# Altium PCB DC_AC_Inverter.PcbDoc (part 1 of 4)
Units mil, origin at the board's own origin, x right, y up, seen from the top; angles counter-clockwise.
Board outline 6496.06 x 4566.93 mil, 6 copper layers (L1, L2, L3, L4, L5, L6), stack 22.312 mil thick; 133 components, 65 nets, 349 pads, 134 vias.
Unrouted connection lines stored in the file: 226.
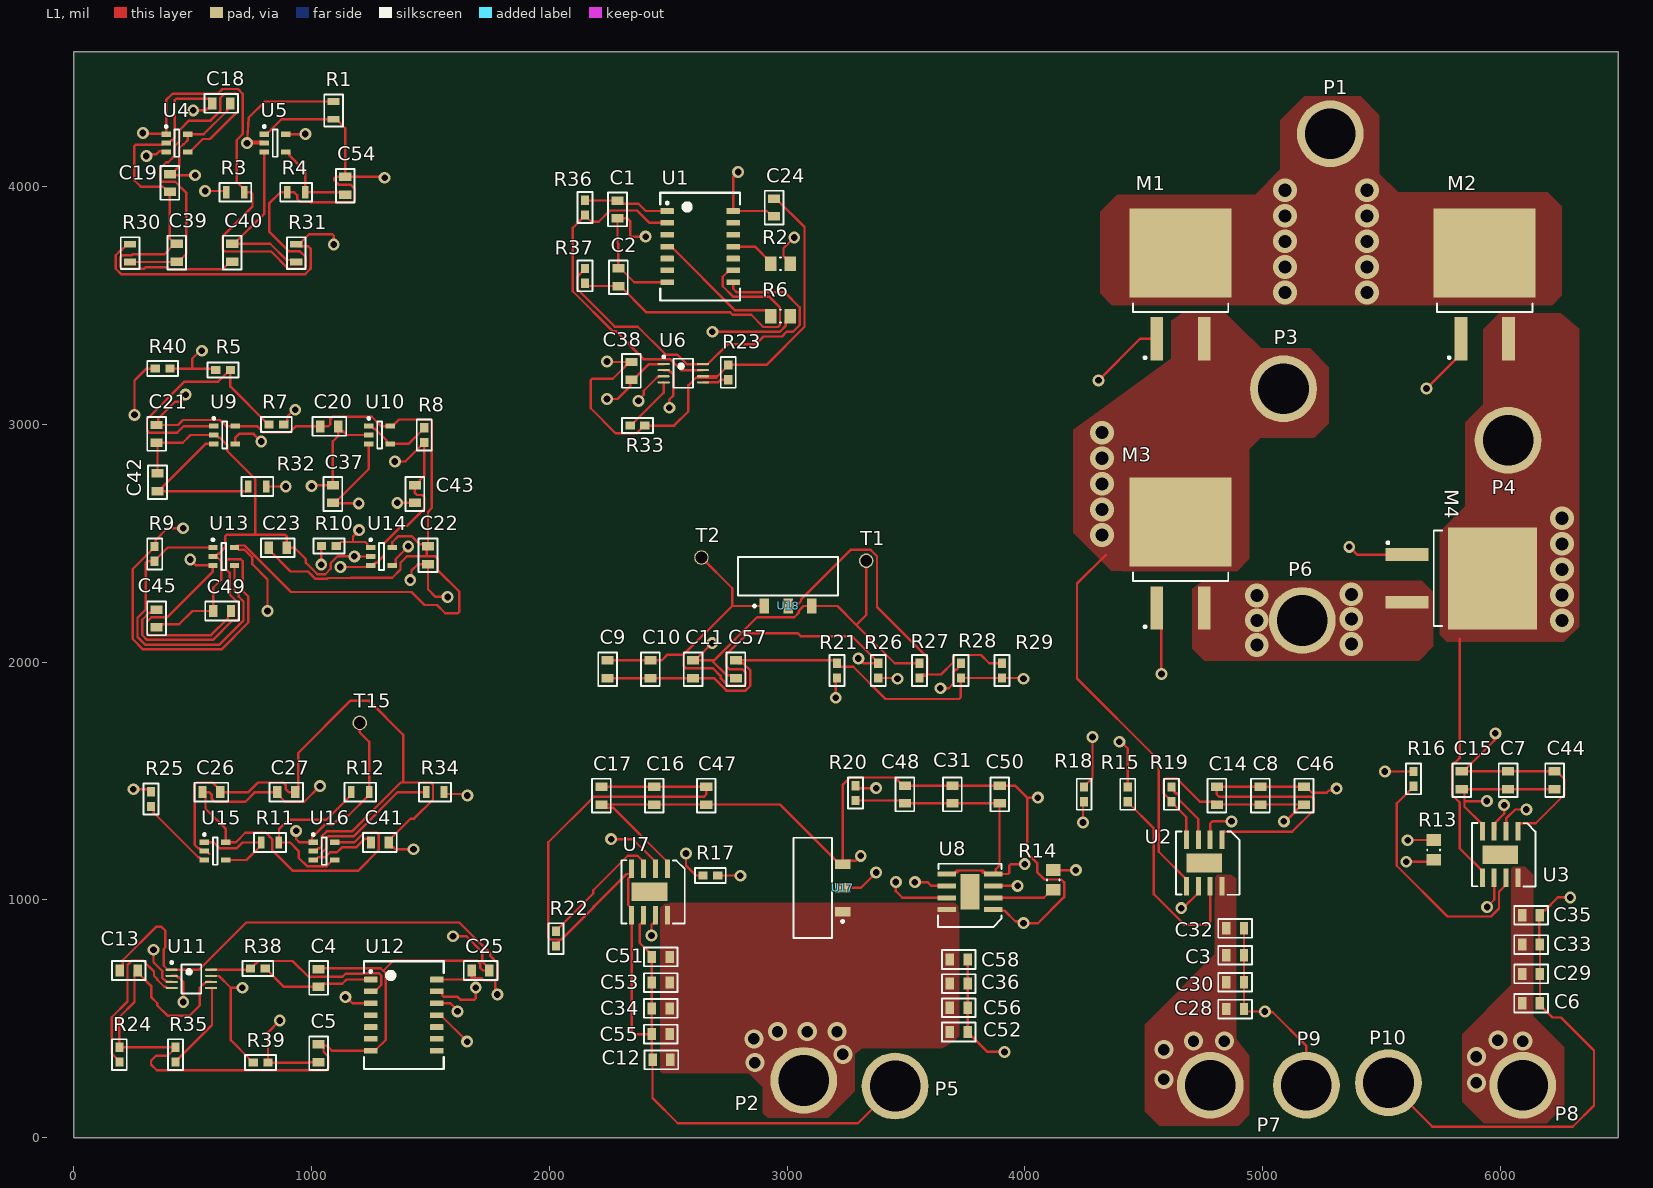
[diagram p0: L1 view]
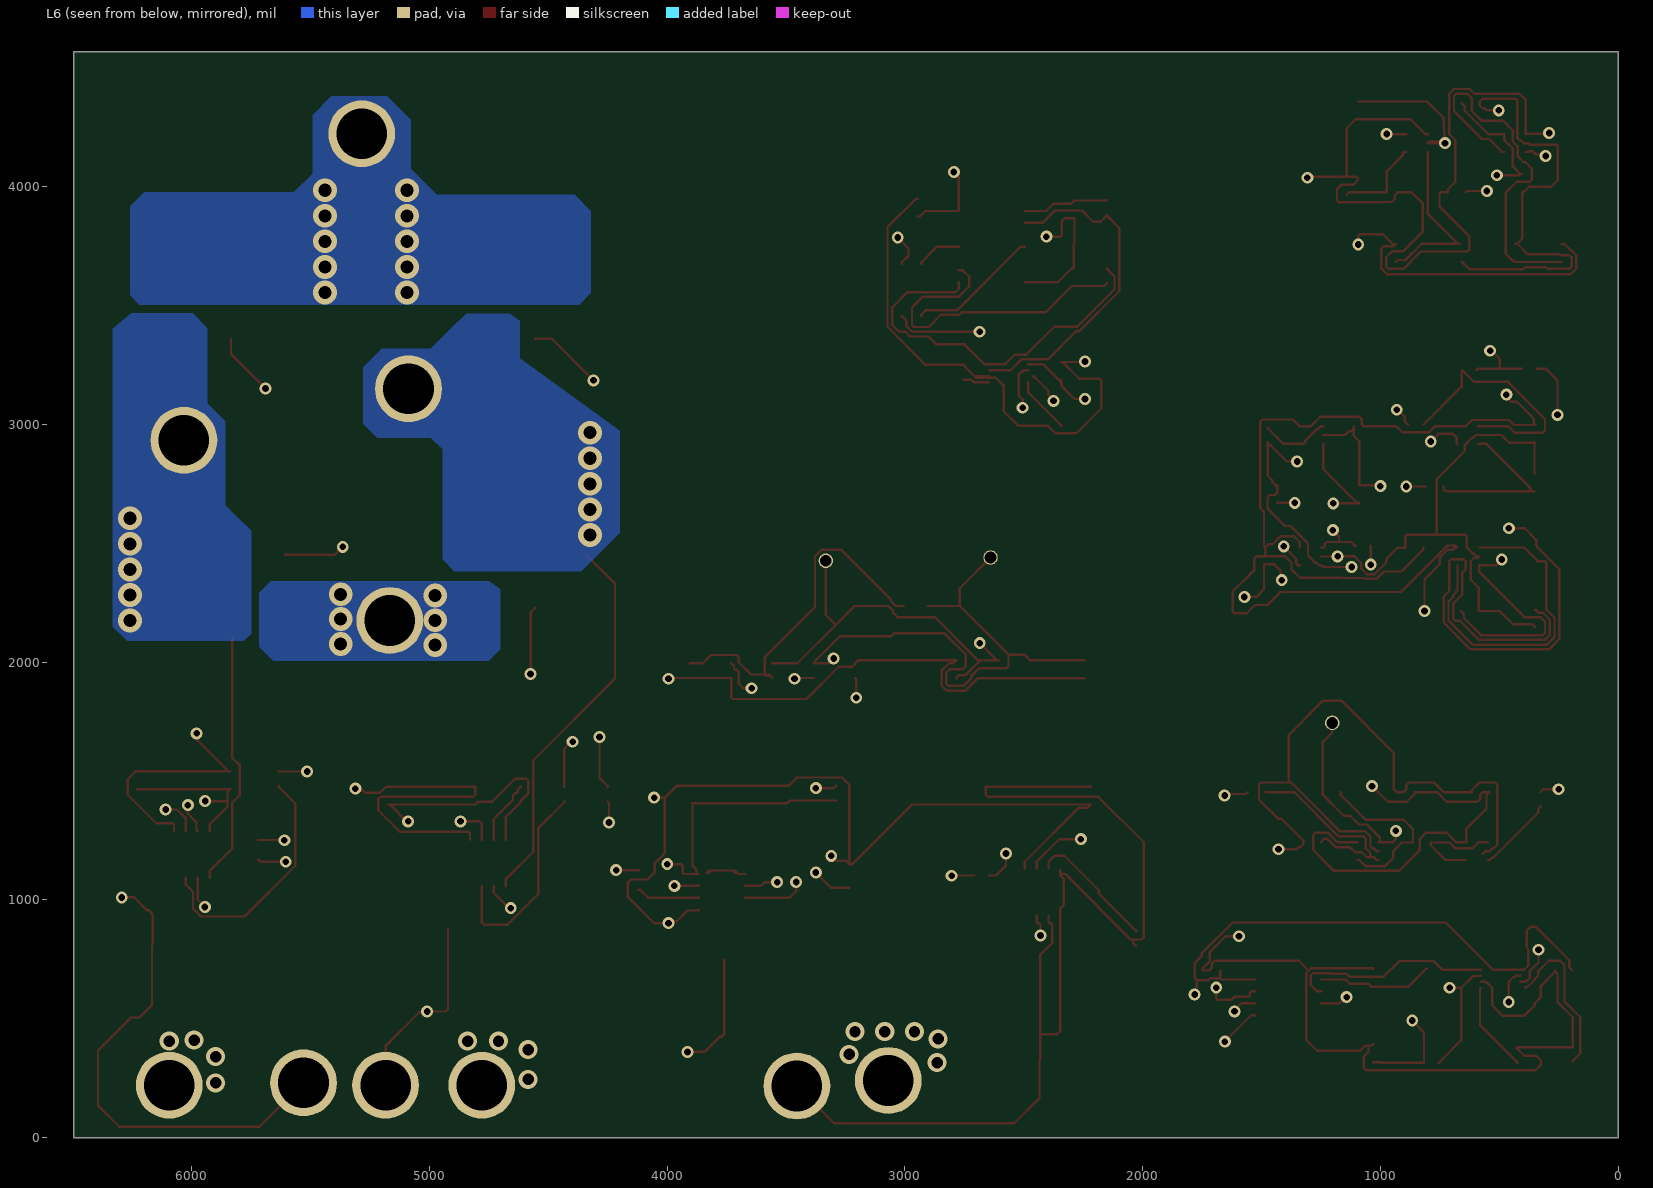
[diagram p1: L6 view, seen from below]
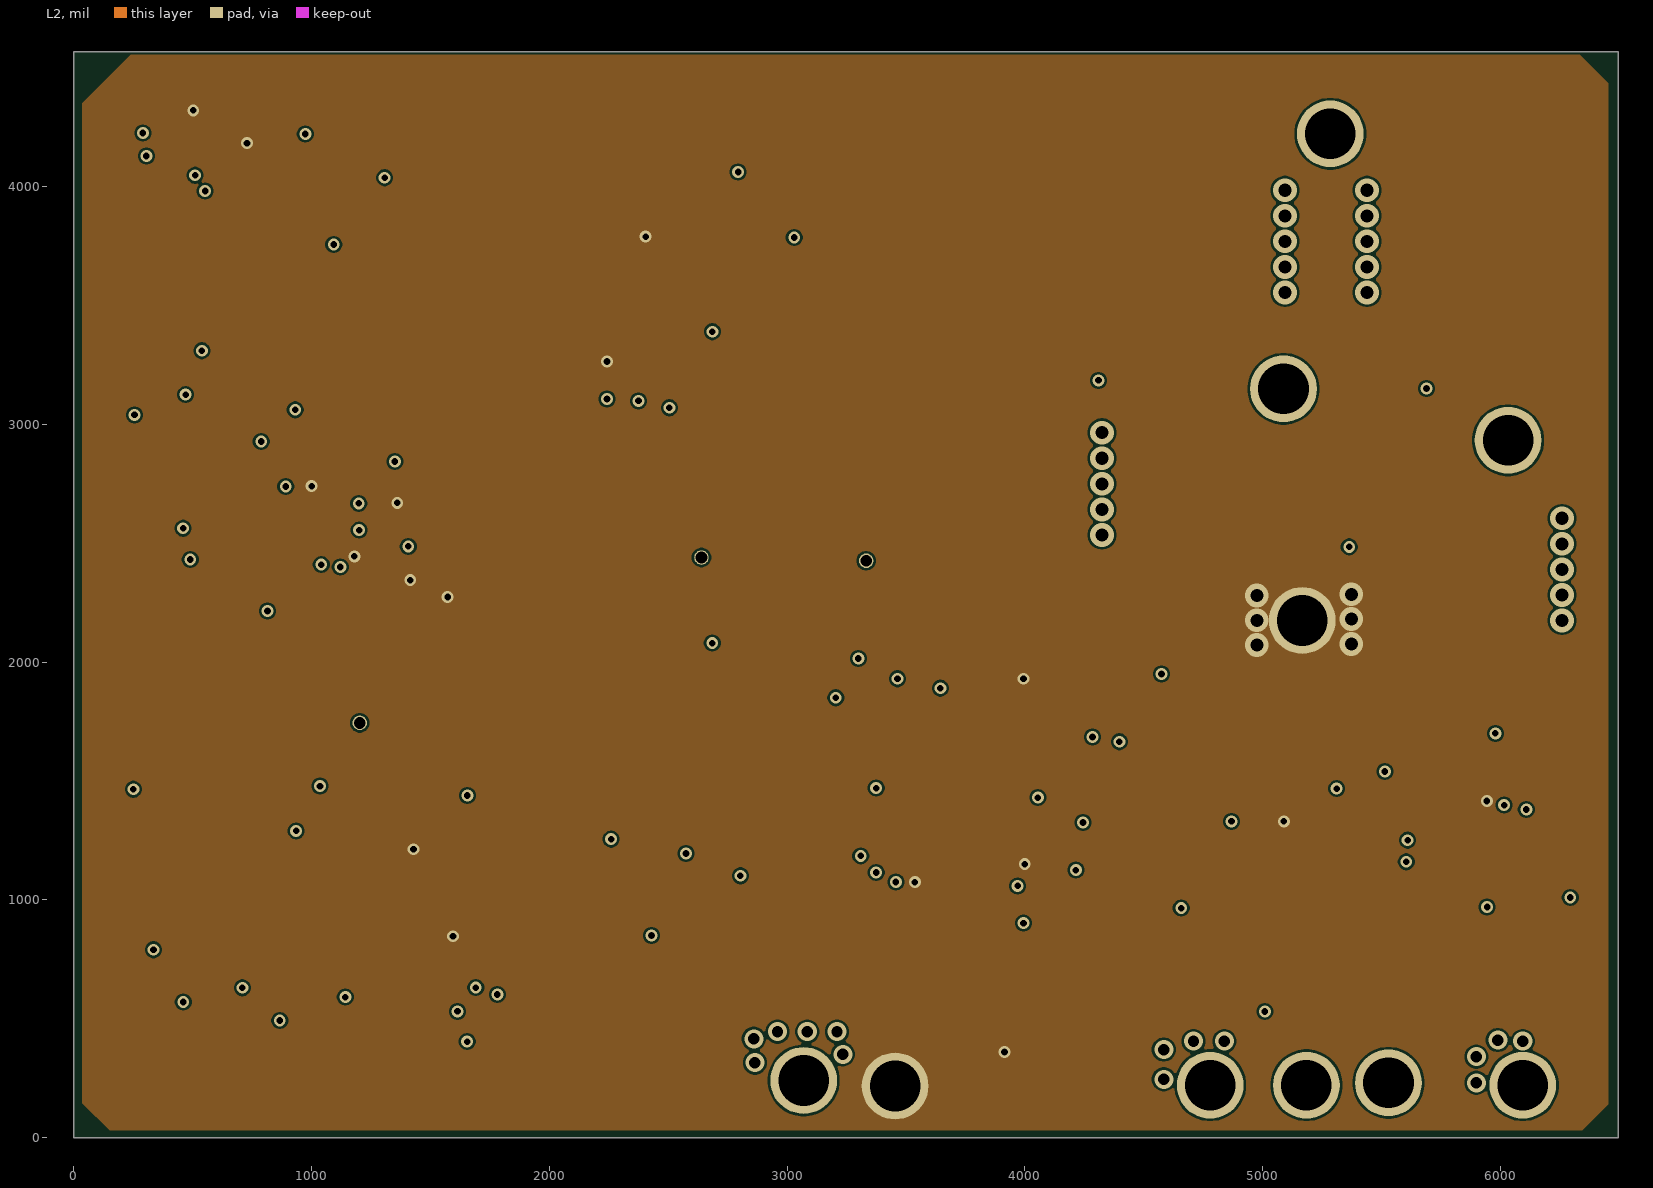
[diagram p2: L2]
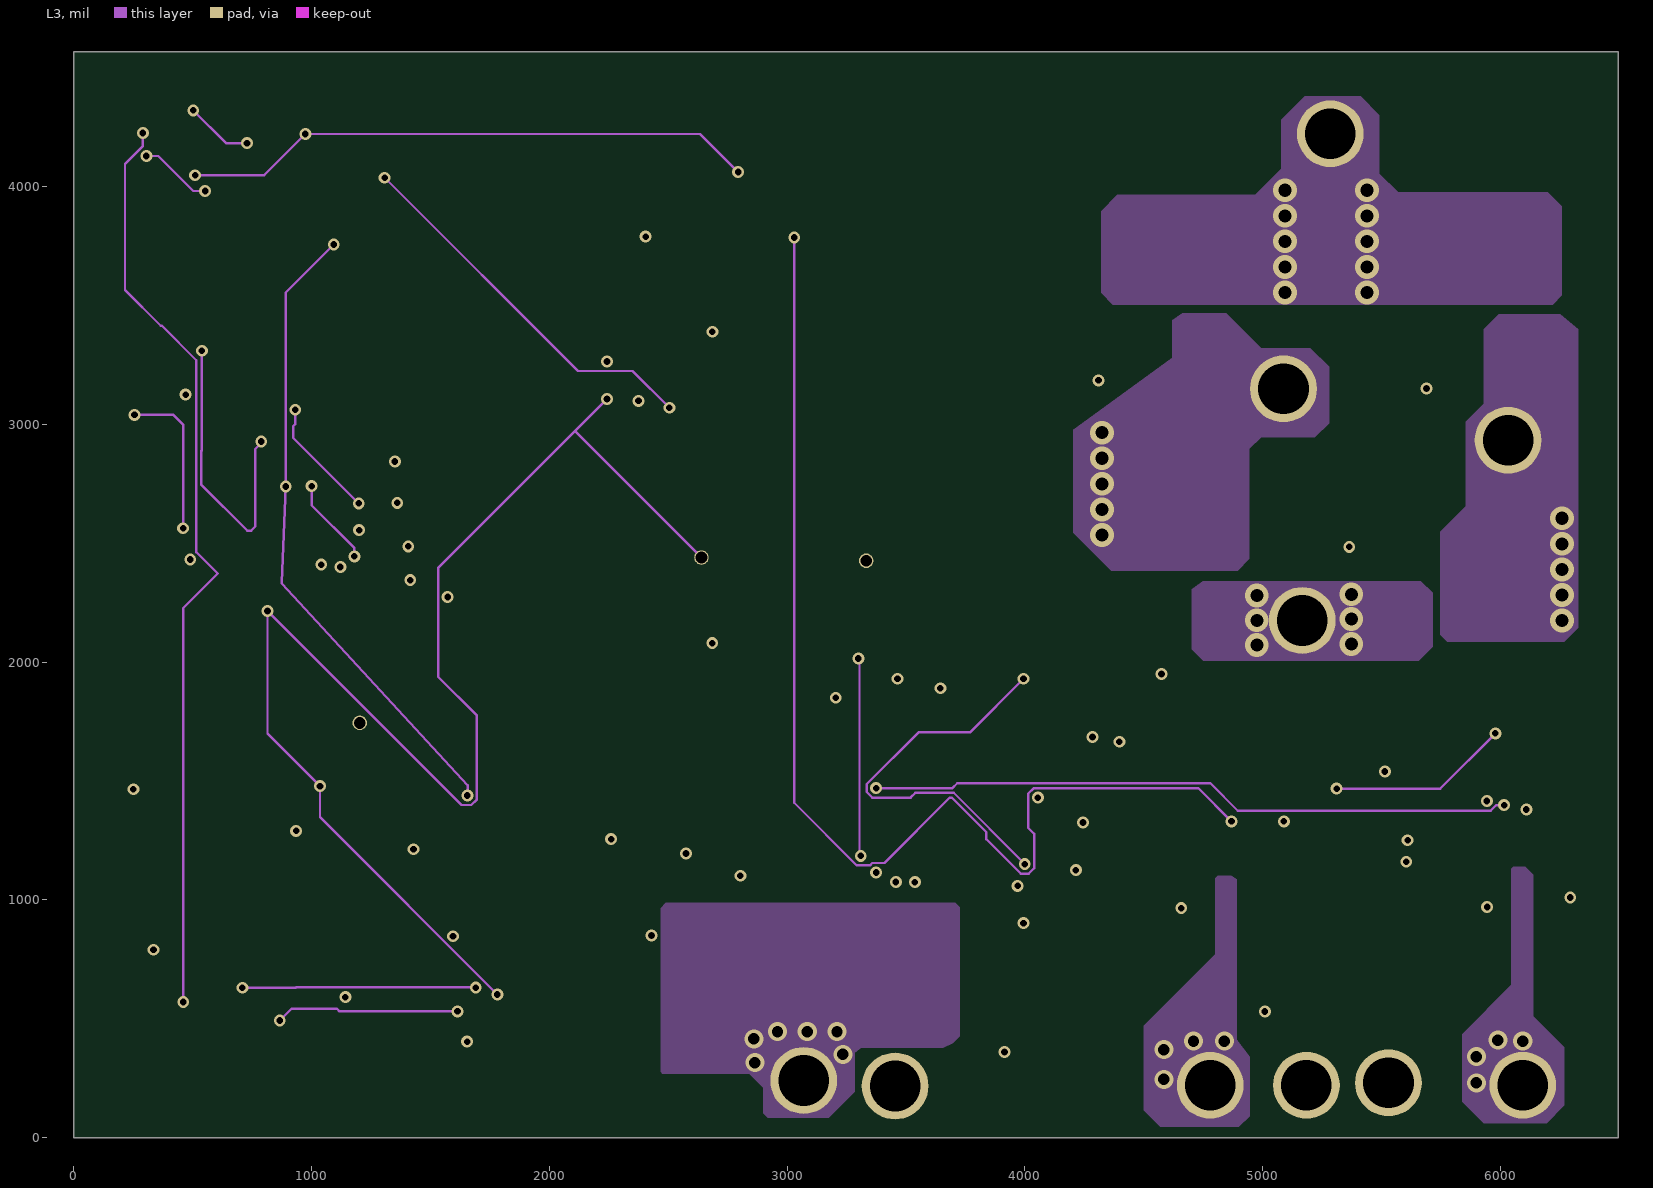
[diagram p3: L3]
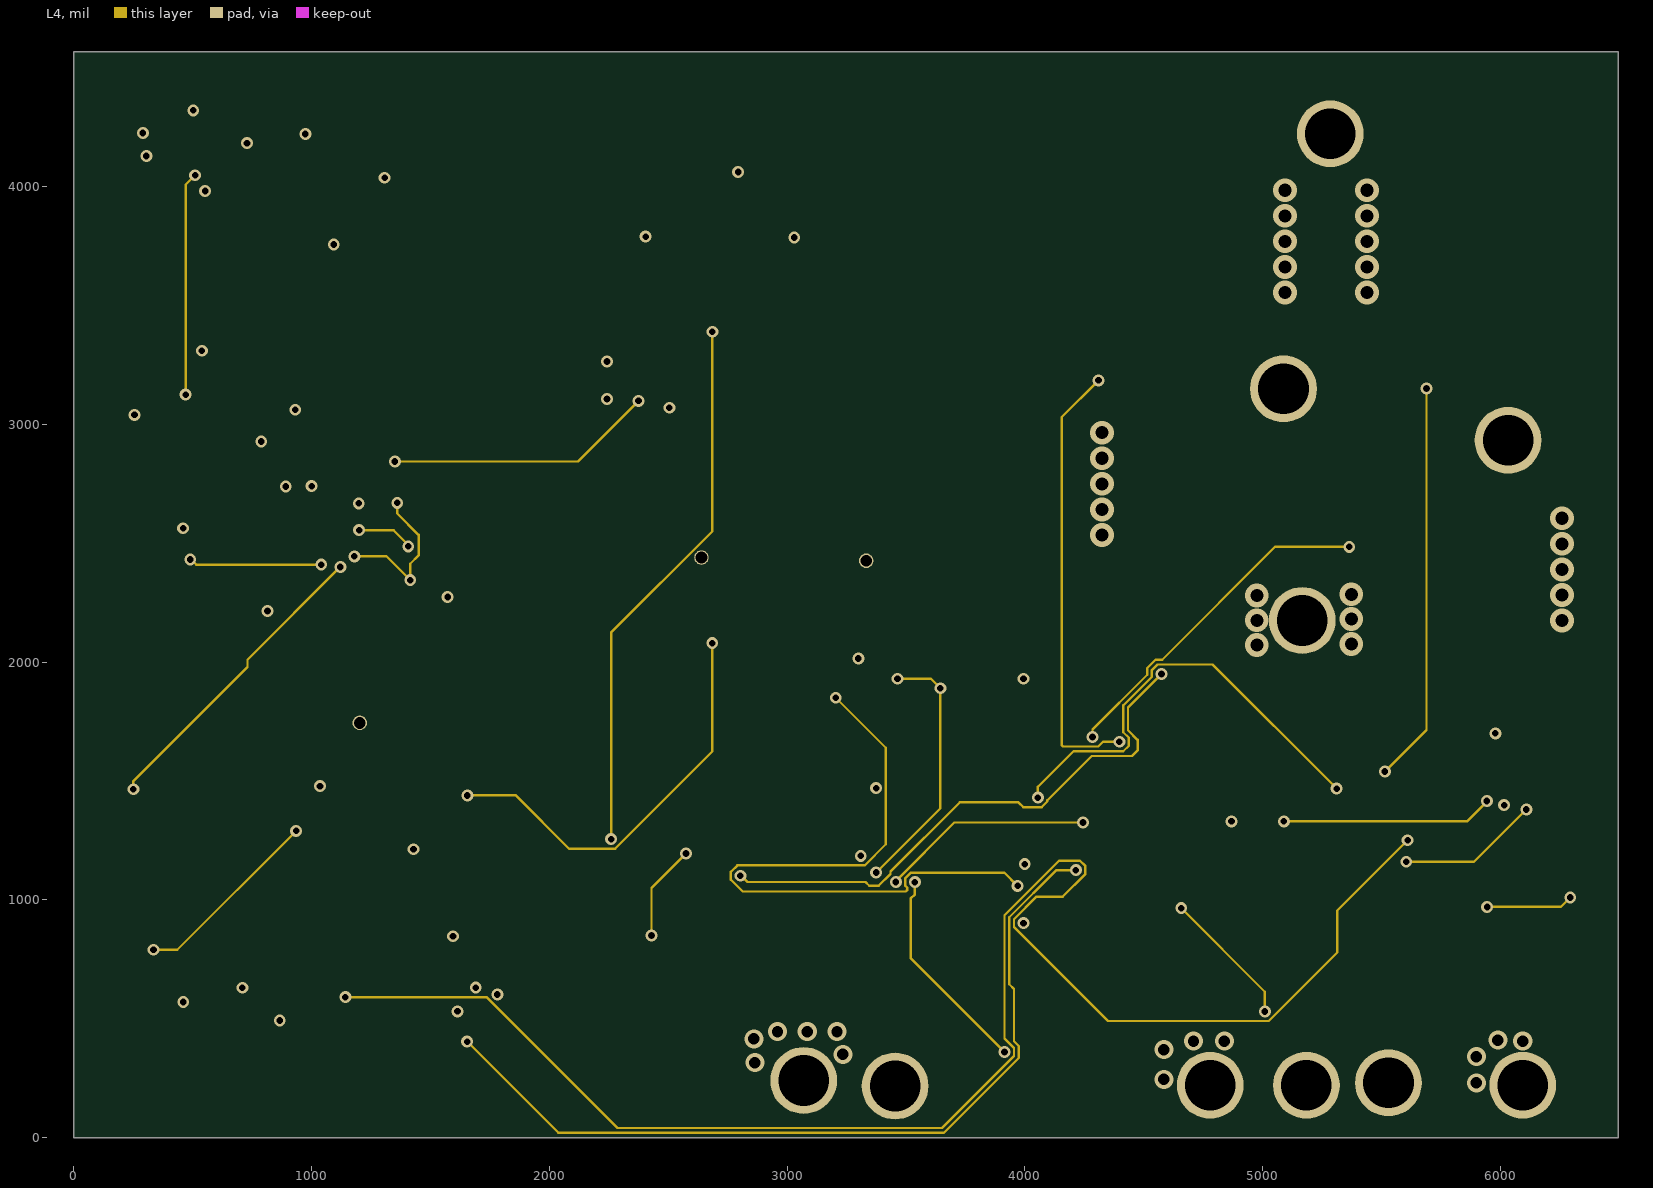
[diagram p4: L4]
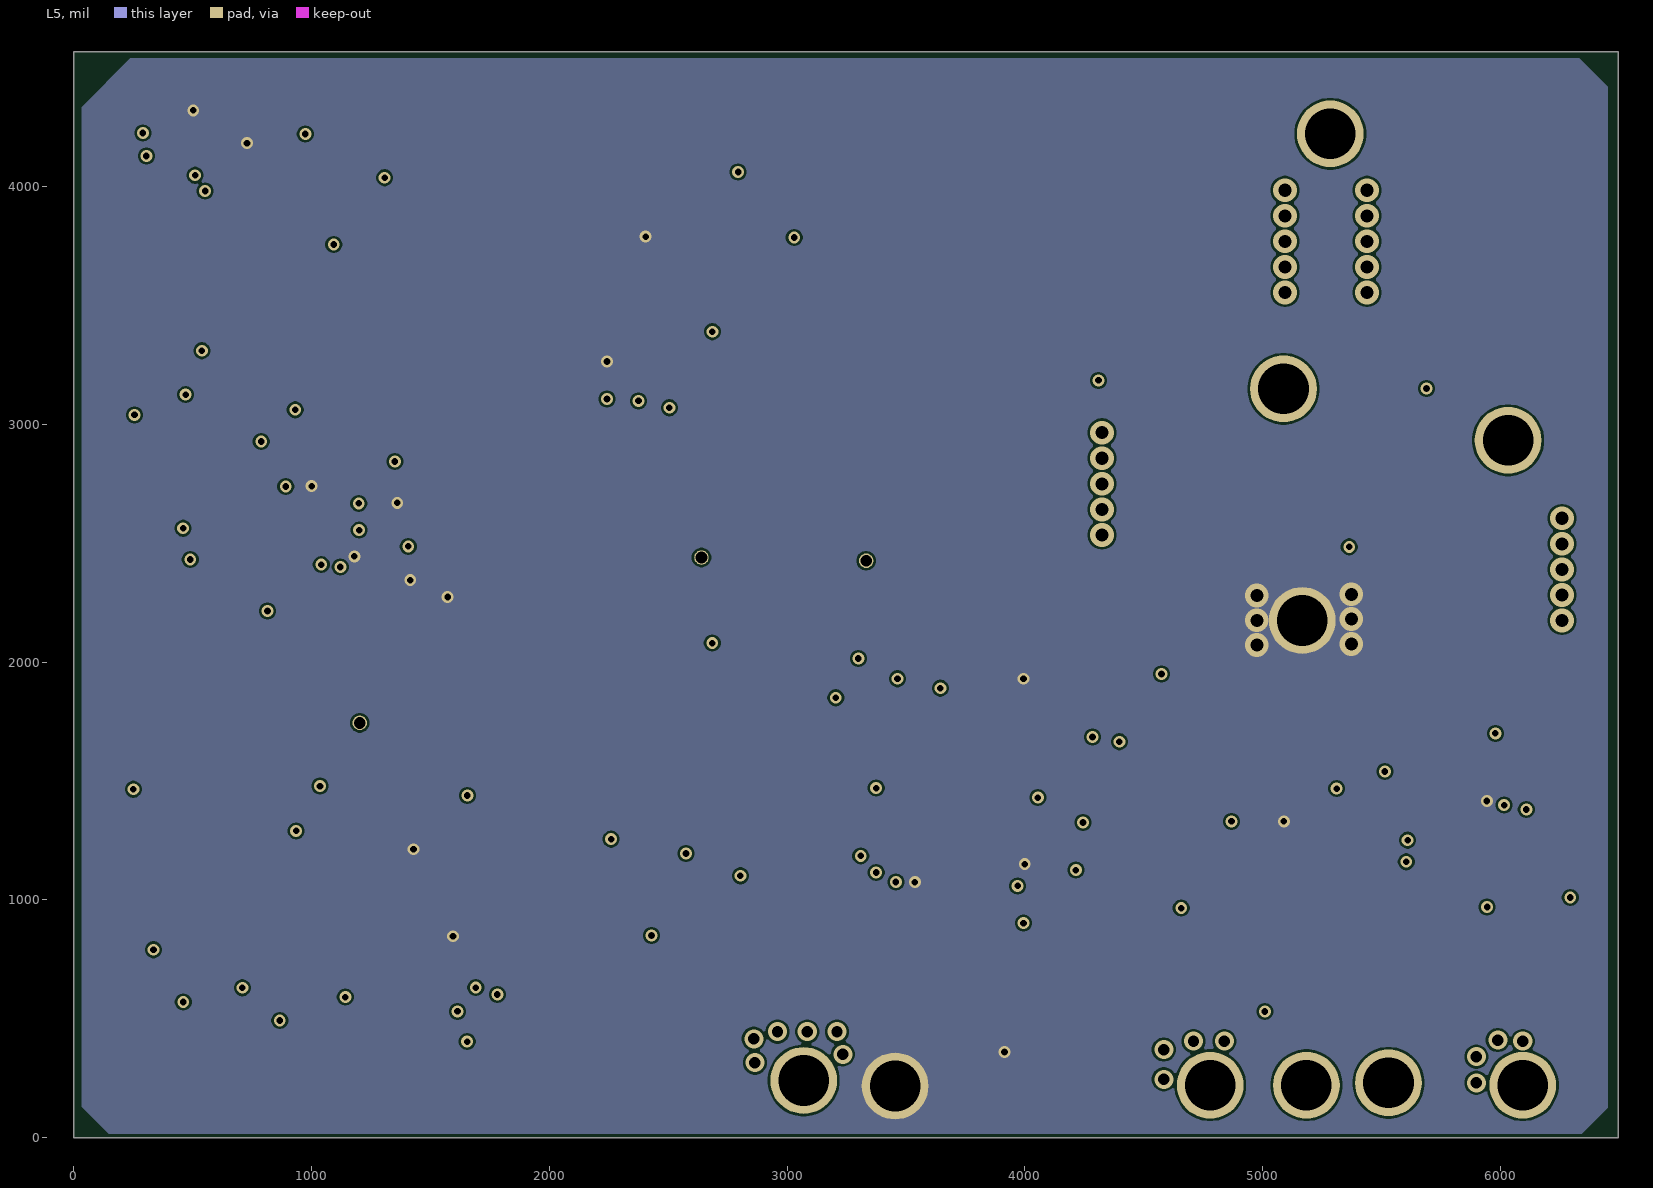
[diagram p5: L5]

## Layer stack, top to bottom
Top Solder: solder mask 0.4, Solder Resist, Dk 3.5
L1: signal copper 1.4
Dielectric 6: prepreg 2.8, PP-006, Dk 4.1
L2: signal copper 1.378
Dielectric 2: prepreg 2.8, PP-006, Dk 4.1
L3: signal copper 1.378
Dielectric 3: prepreg 2.8, PP-006, Dk 4.1
L4: signal copper 1.378
Dielectric 4: prepreg 2.8, PP-006, Dk 4.1
L5: signal copper 1.4
Dielectric 7: prepreg 2.8, PP-006, Dk 4.1
L6: signal copper 1.378
Bottom Solder: solder mask 0.4, Solder Resist, Dk 3.5

## Board outline
0,0 0,4566.93 6496.06,4566.93 6496.06,0

## Design rules (kind name [scope] priority, off if disabled: settings)
AcuteAngle [All] p1: minimum=8.80000000000000E+0001 checktracksonly=FALSE
Clearance [All] p1: gap=10 ignorepadtopadclearanceinfootprint=FALSE
ComponentClearance [All] p1: gap=6.3 collisioncheckmode=3 verticalgap=6.3 showdistances=FALSE
HoleSize [All] p1: absolutevalues=TRUE maxlimit=5000 minlimit=1 maxpercent=80.000 minpercent=20.000
MinimumSolderMaskSliver [All] p1: minsoldermaskwidth=3.94
PolygonConnect [All] p1: connectstyle=Direct reliefconductorwidth=10 reliefentries=4 polygonreliefangle="90 Angle" airgapwidth=10
RoutingVias [All] p1: holewidth=28 width=50 viastyle="Through Hole" minholewidth=28 minwidth=50 maxholewidth=28 maxwidth=50
SilkToSolderMaskClearance [IsPad] p1: minsilkscreentomaskgap=3.94 clearancetoexposedcopper=TRUE
SolderMaskExpansion [All] p1: expansion=4 istentingtop=FALSE
SupplyNets "Schematic Supply Nets_8" [InNet('-20V_1')] p1: voltage=0.000
SupplyNets "Schematic Supply Nets_2" [InNet('-20V_2')] p2: voltage=0.000
SupplyNets "Schematic Supply Nets_7" [InNet('+20V_1')] p3: voltage=0.000
SupplyNets "Schematic Supply Nets_6" [InNet('+20V_2')] p4: voltage=0.000
SupplyNets "Schematic Supply Nets_5" [InNet('GND')] p5: voltage=0.000
SupplyNets "Schematic Supply Nets_4" [InNet('+20V')] p6: voltage=0.000
SupplyNets "Schematic Supply Nets_3" [InNet('+5V')] p7: voltage=0.000
SupplyNets "Schematic Supply Nets_1" [InNet('+170')] p8: voltage=0.000
SupplyNets "Schematic Supply Nets" [InNet('+2.5V')] p9: voltage=0.000
Width [All] p1: maxlimit=10 minlimit=10 preferedwidth=10
26 further rules are at their usual default settings.

## Components (designator, comment, footprint, x,y, rotation, side; value= is the part's Value field where it differs from the comment)
C1 "1nF/50V" CAPACITOR 2286.67,3904.25 r270 top value=1nF
C2 "1nF/50V" CAPACITOR 2290.61,3619.35 r270 top value=1nF
C3 "100nF/50V" CAPACITOR 4885,766.67 r180 top value=100nF
C4 "1nF/50V" CAPACITOR 1029.53,671.26 r90 top value=1nF
C5 "1nF/50V" CAPACITOR 1029.53,354.29 r90 top value=1nF
C6 "100nF/50V" CAPACITOR 6130,565 r180 top value=100nF
C7 "100nF/50V" CAPACITOR 6033.6,1503.13 r90 top value=100nF
C8 "100nF/50V" CAPACITOR 4991.47,1438.13 r90 top value=100nF
C9 "1uF/6.3V" CAPACITOR 2245,1970 r90 top value=1µF
C10 "10uF/25V" CAPACITOR 2425,1970 r270 top value=10µF
C11 "1uF/6.3V" CAPACITOR 2605,1970 r90 top value=1µF
C12 "10uF/25V" CAPACITOR 2471.63,326.8 r180 top value=10µF
C13 "10nF/50V" CAPACITOR 230.31,702.76 r0 top value=10nF
C14 "1nF/50V" CAPACITOR 4808.07,1438.13 r90 top value=1nF
C15 "1nF/50V" CAPACITOR 5838.24,1503.13 r90 top value=1nF
C16 "1nF/50V" CAPACITOR 2441.27,1438.13 r270 top value=1nF
C17 "100nF/50V" CAPACITOR 2218.83,1438.13 r270 top value=100nF
C18 "10nF/16V" CAPACITOR 620.08,4350.39 r180 top value=10nF
C19 "10nF/16V" CAPACITOR 403.54,4015.75 r270 top value=10nF
C20 "10nF" CAPACITOR 1074.53,2991.65 r0 top
C21 "10nF/16V" CAPACITOR 347.82,2960.16 r270 top value=10nF
C22 "10nF/16V" CAPACITOR 1489.49,2449.37 r270 top value=10nF
C23 "10nF/16V" CAPACITOR 857.2,2480.87 r0 top value=10nF
C24 "10nF/16V" CAPACITOR 2945.67,3912.13 r270 top value=10nF
C25 "10nF/16V" CAPACITOR 1710.63,702.76 r0 top value=10nF
C26 "10nF/16V" CAPACITOR 578.46,1452.83 r0 top value=10nF
C27 "10nF/16V" CAPACITOR 893.43,1452.83 r0 top value=10nF
C28 "1nF/50V" CAPACITOR 4885,540 r180 top value=1nF
C29 "1nF/50V" CAPACITOR 6130,688.33 r180 top value=1nF
C30 "68nF/50V" CAPACITOR 4885,653.33 r180 top value=68nF
C31 "100nF/50V" CAPACITOR 3695.43,1443.13 r90 top value=100nF
C32 "22uF/25V" CAPACITOR 4885,880 r180 top value=22µF
C33 "68nF/50V" CAPACITOR 6130,811.67 r180 top value=68nF
C34 "100nF/50V" CAPACITOR 2468.68,543.34 r0 top value=100nF
C35 "22uF/25V" CAPACITOR 6130,935 r180 top value=22µF
C36 "100nF/50V" CAPACITOR 3722.32,647.33 r180 top value=100nF
C37 "100nF/50V" CAPACITOR 1089.23,2707.2 r270 top value=100nF
C38 "10nF/16V" CAPACITOR 2345.24,3225.08 r90 top value=10nF
C39 "1uF/6.3V" CAPACITOR 432.41,3722.44 r90 top value=1µF
C40 "1uF/6.3V" CAPACITOR 666.01,3722.44 r90 top value=1µF
C41 "1uF/6.3V" CAPACITOR 1287.13,1241.22 r0 top value=1µF
C42 "1uF/6.3V" CAPACITOR 351.69,2756.42 r270 top value=1µF
C43 "100nF/50V" CAPACITOR 1434.37,2707.2 r90 top value=100nF
C44 "1uF/6.3V" CAPACITOR 6228.96,1503.13 r90 top value=1µF
C45 "100nF/50V" CAPACITOR 347.82,2183.58 r90 top value=100nF
C46 "1uF/6.3V" CAPACITOR 5174.87,1438.13 r90 top value=1µF
C47 "1uF/6.3V" CAPACITOR 2660,1438.13 r270 top value=1µF
C48 "1nF/50V" CAPACITOR 3495.96,1443.13 r90 top value=1nF
C49 "100nF/50V" CAPACITOR 623.35,2215.08 r0 top value=100nF
C50 "1uF/6.3V" CAPACITOR 3894.91,1443.13 r90 top value=1µF
C51 "1nF/50V" CAPACITOR 2468.68,759.87 r0 top value=1nF
C52 "1nF/50V" CAPACITOR 3722.32,443.91 r180 top value=1nF
C53 "68nF/50V" CAPACITOR 2468.68,651.61 r0 top value=68nF
C54 "3.9nF/50V" CAPACITOR 1141.73,4003.94 r90 top value=3.9nF
C55 "22uF/25V" CAPACITOR 2468.68,435.07 r0 top value=22µF
C56 "68nF/50V" CAPACITOR 3722.32,545.62 r180 top value=68nF
C57 "10uF/25V" CAPACITOR 2785,1970 r90 top value=10µF
C58 "22uF/25V" CAPACITOR 3722.32,749.03 r180 top value=22µF
M1 "N-Channel MOSFET 200V" SOT89-254P1058X483-3N 4655.51,3540.35 r90 top
M2 "N-Channel MOSFET 200V" SOT89-254P1058X483-3N 5935.04,3540.35 r90 top
M3 "N-Channel MOSFET 200V" SOT89-254P1058X483-3N 4655.51,2408.46 r90 top
M4 "N-Channel MOSFET 200V" SOT89-254P1058X483-3N 5787.4,2352.36 r0 top
P1 "PEM" PEMS 5285.43,4222.44 r0 top
P2 "PEM" PEMS 3070,240 r0 top
P3 "PEM" PEMS 5088.58,3149.61 r0 top
P4 "PEM" PEMS 6033.46,2933.07 r0 top
P5 "PEM" PEMs 3454.72,216.54 r0 top
P6 "PEM" PEMs 5167.32,2175.2 r0 top
P7 "PEM" PEMs 4780,220 r0 top
P8 "PEM" PEMs 6095,220 r0 top
P9 "PEM" PEMs 5185,220 r0 top
P10 "PEM" PEMs 5530,230 r0 top
R1 "10k" R0805 1092.52,4320.87 r90 top value=10kΩ
R2 "5K" RESIS5K 2972.31,3675.91 r0 top value=5kΩ
R3 "10k" R0805 679.13,3976.38 r0 top value=10kΩ
R4 "10k" R0805 935.04,3976.38 r0 top value=10kΩ
R5 "2.2M" Resistor-26.7 627.28,3228.86 r0 top value=2.2MΩ
R6 "5K" RESIS5K 2972.31,3455.43 r0 top value=5kΩ
R7 "26.7k" RESISTOR-26.7 851.34,2999.53 r0 top value=26.7kΩ
R8 "26.7k" RESISTOR-26.7 1473.74,2955.24 r90 top value=26.7kΩ
R9 "26.7k" RESISTOR-26.7 339.94,2455.24 r270 top value=26.7kΩ
R10 "26.7k" RESISTOR-26.7 1072.6,2488.74 r0 top value=26.7kΩ
R11 "10k" R0805 825.14,1241.22 r0 top value=10kΩ
R12 "10k" R0805 1204.45,1452.83 r0 top value=10kΩ
R13 "5K" RESIS5K 5720,1210 r90 top value=5kΩ
R14 "5K" RESIS5K 4120,1083.66 r90 top value=5kΩ
R15 "0 ohm" RESISTOR-26.7 4433.4,1444 r270 top value=0Ω
R16 "0 ohm" RESISTOR-26.7 5635,1509 r90 top value=0Ω
R17 "0 ohm" RESISTOR-26.7 2677.17,1102.36 r180 top value=0Ω
R18 "0 ohm" RESISTOR-26.7 4250,1444 r90 top value=0Ω
R19 "0 ohm" RESISTOR-26.7 4616.8,1444 r270 top value=0Ω
R20 "0 ohm" RESISTOR-26.7 3288.61,1449 r90 top value=0Ω
R21 "0 ohm" RESISTOR-26.7 3210,1964.13 r90 top value=0Ω
R22 "0 ohm" RESISTOR-26.7 2027.56,836.61 r270 top value=0Ω
R23 "0 ohm" RESISTOR-26.7 2752.76,3219.21 r270 top value=0Ω
R24 "0 ohm" RESISTOR-26.7 190.94,348.43 r90 top value=0Ω
R25 "0 ohm" RESISTOR-26.7 325,1424 r90 top value=0Ω
R26 "240" RESISTOR-26.7 3383.75,1964.13 r90 top value=240Ω
R27 "240" RESISTOR-26.7 3557.5,1964.13 r90 top value=240Ω
R28 "750 ohm" RESISTOR-26.7 3731.25,1964.13 r90 top value=750Ω
R29 "240" RESISTOR-26.7 3905,1964.13 r90 top value=240Ω
R30 "10k" R0805 236.22,3720.47 r270 top value=10kΩ
R31 "10k" R0805 935.04,3720.47 r90 top value=10kΩ
R32 "10k" R0805 771.64,2738.7 r0 top value=10kΩ
R33 "0 ohm" RESISTOR-26.7 2370.87,2994.8 r180 top value=0Ω
R34 "10k" R0805 1519.41,1452.83 r0 top value=10kΩ
R35 "0 ohm" RESISTOR-26.7 427.17,348.43 r90 top value=0Ω
R36 "0 ohm" RESISTOR-26.7 2150.39,3912.13 r270 top value=0Ω
R37 "0 ohm" RESISTOR-26.7 2150.39,3625.22 r90 top value=0Ω
R38 "0 ohm" RESISTOR-26.7 773.62,710.63 r180 top value=0Ω
R39 "0 ohm" RESISTOR-26.7 785.43,314.92 r180 top value=0Ω
R40 "470k" RESISTOR-26.7 373.45,3234.76 r0 top value=470kΩ
T1 "Testpoint" TESTPOINTS 3332.97,2426.34 r0 top
T2 "Testpoint" TESTPOINTS 2640,2440 r0 top
T15 "Testpoint" TESTPOINTS 1202.48,1744.17 r0 top
U1 "AND GATE IC" ANDLOGICIC 2634.65,3747.68 r0 top
U2 "MAX22700EASA+" MAX227 4755,1155 r270 top
U3 "MAX22700EASA+" MAX227 6000,1190 r270 top
U4 "LTC6240" LTC6240 433.07,4183.07 r0 top
U5 "LTC6240" LTC6240 846.46,4183.07 r0 top
U6 "LT1711" LT1711 2563.78,3215.24 r0 top
U7 "MAX22700EASA+" MAX227 2421.26,1033.46 r270 top
U8 "MAX22700EASA+" MAX227 3769.69,1033.46 r180 top
U9 "LTC6240" LTC6240 634.04,2955.24 r0 top
U10 "LTC6240" LTC6240 1286.01,2955.24 r0 top
U11 "LT1711" LT1711 494.09,667.32 r0 top
U12 "AND GATE IC" ANDLOGICIC 1387.8,514.68 r0 top
U13 "LTC6240" LTC6240 630.1,2444.45 r0 top
U14 "LTC6240" LTC6240 1293.88,2444.45 r0 top
U15 "LTC6240" LTC6240 594.21,1204.8 r0 top
U16 "LTC6240" LTC6240 1052.26,1204.8 r0 top
U17 "Voltage Regulator" SOT254P700X939-4N 3108.66,1050.2 r180 top
U18 "Voltage Regulator" SOT254P700X939-4N 3004.38,2361.09 r90 top

## Footprints (in the part's own frame and the unit in brackets; to place one, negate y for a bottom-side part, rotate by r counter-clockwise, add the part's x,y. Pads: shape width x height; smd on the part's side, far side on the other; paste and mask are expansions set on the pad)
ANDLOGICIC [mm] "SOP, 14-Leads, Body 10.2x5.3mm, Pitch 1.27mm, IPC High Density"
  rrect17% 1.45x0.6 smd: 1(-3.525,3.81) 2(-3.525,2.54) 3(-3.525,1.27) 4(-3.525,0) 5(-3.525,-1.27) 6(-3.525,-2.54) 7(-3.525,-3.81) 8(3.525,-3.81) 9(3.525,-2.54) 10(3.525,-1.27) 11(3.525,0) 12(3.525,1.27) 13(3.525,2.54) 14(3.525,3.81)
  silkscreen extent -4.25,-5.75 4.25,5.75, body extent -2.8,-5.25 2.8,5.25, height 2
CAPACITOR [mm]
  rect 0.9x1.3 smd: 1(-0.95,0) 2(0.95,0)
  silkscreen extent -1.8,-1 1.8,1
LT1711 [mm] "SOP, 8-Leads, Body 3x3mm, Pitch 0.65mm, IPC High Density"
  oval 1.3x0.22 smd: 1(-2.1,0.975) 2(-2.1,0.325) 3(-2.1,-0.325) 4(-2.1,-0.975) 5(2.1,-0.975) 6(2.1,-0.325) 7(2.1,0.325) 8(2.1,0.975)
  silkscreen extent -2.22,-1.55 1.05,1.87, body extent -1.55,-1.55 1.55,1.55, height 1.1
LTC6240 [mm] "SOT23, 5-Leads, Body 2.90x1.63mm, Pitch 0.95mm, IPC High Density"
  rect 1x0.55 smd: 1(-1.15,0.95) 2(-1.15,0) 3(-1.15,-0.95) 4(1.15,-0.95) 5(1.15,0.95)
  silkscreen extent -1.27,-1.45 0.25,1.9, body extent -0.87,-1.45 0.87,1.45, height 1
MAX227 [mm]
  rect 1.98x0.53 smd: 1(-2.485,1.905) 2(-2.485,0.635) 3(-2.485,-0.635) 4(-2.485,-1.905) 5(2.485,-1.905) 6(2.485,-0.635) 7(2.485,0.635) 8(2.485,1.905)
  rect 2x3.8 smd: 9(0,0)
  silkscreen extent -3.37,-3 3.4,3.76
PEMS [mil] "Brass Surface Mount Nuts and Spacers / Type SMTSOB"
  round 281 hole 213 paste+0: 1(0,0)
PEMs [mil] "Brass Surface Mount Nuts and Spacers / Type SMTSOB"
  round 281 hole 213 paste+0: 1(0,0)
R0805 [mm]
  rect 0.7x1.3 smd: 1(-0.95,0) 2(0.95,0)
  silkscreen extent -1.7,-1 1.7,1
RESIS5K [mm] "Chip Resistor, 2-Leads, Body 2.03x1.27mm, IPC Low Density"
  rect 1.25x1.55 smd: 1(-1.05,0) 2(1.05,0)
  silkscreen extent -0.05,-0.67 0.05,0.67, body extent -1.09,-0.71 1.09,0.71, height 0.83
Resistor-26.7 [mm]
  rect 0.99x0.86 smd: 1(-0.787,0) 1(-0.787,0) 2(0.787,0) 2(0.787,0)
  silkscreen extent -1.65,-0.8 1.65,0.8
RESISTOR-26.7 [mm]
  rect 0.99x0.86 smd: 1(-0.787,0) 2(0.787,0)
  silkscreen extent -1.65,-0.8 1.65,0.8
SOT89-254P1058X483-3N [mm] "SOT89, 3-Leads, Body 10.16x9.02mm, Pitch 2.54mm, Lead Span 10.6mm, IPC Medium Density"
  rect 9.5x10.9 smd paste-0.05 mask+0: Drain(4.575,0)
  rect 4.6x1.35 smd paste-2539.97 mask+0: Gate(-4.575,2.54)
  rect 4.6x1.35 smd paste-0.05 mask+0: Source(-4.575,-2.54)
  silkscreen extent -6.72,-5.1 -0.8,5.1, body extent -6.27,-5 8.68,5, height 4.51
SOT254P700X939-4N [mm] "SOT223, 4-Leads, Body 10.36x7.00mm (avg), Pitch 2.54mm, IPC Medium Density"
  rect 1.65x1 smd: 1(-3.175,2.54) 2(-3.175,0) 3(-3.175,-2.54)
  silkscreen extent -3.3,-5.35 2.05,5.35, body extent -2.35,-5.35 2.35,5.35, height 12.17
TESTPOINTS [mm]
  round 1.55 hole 1.25: T(0,0)

## Part data
C1 C2 C4 C5 C14 C15 C16 C28 C29 C48 C51 C52: library part C0603C102K5RACTU, "Multilayer Ceramic Capacitors Mlcc - Smd/Smt 50V 1000Pf X7R 0603 10%", Case Code (Imperial)=0603, Dielectric=X7R, Dielectric Material=Ceramic, Manufacturer=KEMET, Max Operating Temperature=125°C, Min Operating Temperature=-55°C, Supplier Part Number=399-C0603C102K5RACTUDKR-ND, Temperature Coefficient=30ppm/°C, Tolerance=10%, Voltage=50V, Case/Package=0603, Category="Ceramic Capacitors", China RoHS=Compliant, ComponentLink1Description=https://datasheet.octopart.com:443/C0603C102K5RAC7867-KEMET-datasheet-179096092.pdf?src-supplier=IHS, ComponentLink1URL=https://datasheet.octopart.com:443/C0603C102K5RAC7867-KEMET-datasheet-179096092.pdf?src-supplier=IHS, ComponentLink2Description=https://datasheet.octopart.com:443/C0603C102K5RACTU-KEMET-datasheet-178445679.pdf?src-supplier=IHS, ComponentLink2URL=https://datasheet.octopart.com:443/C0603C102K5RACTU-KEMET-datasheet-178445679.pdf?src-supplier=IHS, ComponentLink3Description=https://datasheet.octopart.com:443/C0603C102K5RACTU-KEMET-datasheet-137357759.pdf?src-supplier=Farnell, ComponentLink3URL=https://datasheet.octopart.com:443/C0603C102K5RACTU-KEMET-datasheet-137357759.pdf?src-supplier=Farnell, ComponentLink4Description=https://datasheet.octopart.com:443/C0603C102K5RAC-TU-Kemet-datasheet-5313890.pdf?src-supplier=Farnell, ComponentLink4URL=https://datasheet.octopart.com:443/C0603C102K5RAC-TU-Kemet-datasheet-5313890.pdf?src-supplier=Farnell, ComponentLink5Description=https://datasheet.octopart.com:443/C0603C102K5RACTU-Kemet-datasheet-8764837.pdf?src-supplier=Farnell, ComponentLink5URL=https://datasheet.octopart.com:443/C0603C102K5RACTU-Kemet-datasheet-8764837.pdf?src-supplier=Farnell, ComponentLink6Description=https://datasheet.octopart.com:443/C0603C102K5RACTU-Kemet-datasheet-8480123.pdf?src-supplier=Farnell, ComponentLink6URL=https://datasheet.octopart.com:443/C0603C102K5RACTU-Kemet-datasheet-8480123.pdf?src-supplier=Farnell, ComponentLink7Description=https://datasheet.octopart.com:443/C0603C102K5RAC-TU-Kemet-datasheet-5390537.pdf?src-supplier=Farnell, ComponentLink7URL=https://datasheet.octopart.com:443/C0603C102K5RAC-TU-Kemet-datasheet-5390537.pdf?src-supplier=Farnell, ComponentLink8Description=https://datasheet.octopart.com:443/C0603C102K5RACTU-Kemet-datasheet-5393970.pdf?src-supplier=Farnell, ComponentLink8URL=https://datasheet.octopart.com:443/C0603C102K5RACTU-Kemet-datasheet-5393970.pdf?src-supplier=Farnell, ComponentLink9Description=https://datasheet.octopart.com:443/C0603C102K5RACTU-Kemet-datasheet-8502025.pdf?src-supplier=Farnell, ComponentLink9URL=https://datasheet.octopart.com:443/C0603C102K5RACTU-Kemet-datasheet-8502025.pdf?src-supplier=Farnell, ComponentLink10Description=https://datasheet.octopart.com:443/C0603C102K5RAC-TU-Kemet-datasheet-7541751.pdf?src-supplier=Farnell, ComponentLink10URL=https://datasheet.octopart.com:443/C0603C102K5RAC-TU-Kemet-datasheet-7541751.pdf?src-supplier=Farnell, ComponentLink11Description=https://datasheet.octopart.com:443/C0603C102K5RACTU-Kemet-datasheet-161801.pdf?src-supplier=Farnell, ComponentLink11URL=https://datasheet.octopart.com:443/C0603C102K5RACTU-Kemet-datasheet-161801.pdf?src-supplier=Farnell, ComponentLink12Description=https://datasheet.octopart.com:443/C0603C102K5RACTU-KEMET-datasheet-101575634.pdf?src-supplier=Farnell, ComponentLink12URL=https://datasheet.octopart.com:443/C0603C102K5RACTU-KEMET-datasheet-101575634.pdf?src-supplier=Farnell, ComponentLink13Description=https://datasheet.octopart.com:443/C0603C102K5RACTU.-Kemet-datasheet-41232427.pdf?src-supplier=Farnell, ComponentLink13URL=https://datasheet.octopart.com:443/C0603C102K5RACTU.-Kemet-datasheet-41232427.pdf?src-supplier=Farnell, ComponentLink14Description=https://datasheet.octopart.com:443/C0603C102K5RACTU-KEMET-datasheet-176142151.pdf?src-supplier=Farnell, ComponentLink14URL=https://datasheet.octopart.com:443/C0603C102K5RACTU-KEMET-datasheet-176142151.pdf?src-supplier=Farnell, ComponentLink15Description=https://datasheet.octopart.com:443/C0603C102K5RACTU-KEMET-datasheet-130256537.pdf?src-supplier=Farnell, ComponentLink15URL=https://datasheet.octopart.com:443/C0603C102K5RACTU-KEMET-datasheet-130256537.pdf?src-supplier=Farnell, ComponentLink16Description=https://datasheet.octopart.com:443/C0603C102K5RACTU-Kemet-datasheet-14356739.pdf?src-supplier=Farnell, ComponentLink16URL=https://datasheet.octopart.com:443/C0603C102K5RACTU-Kemet-datasheet-14356739.pdf?src-supplier=Farnell, ComponentLink17Description=https://datasheet.octopart.com:443/C0603C102K5RAC-TU-Kemet-datasheet-7833651.pdf?src-supplier=Farnell, ComponentLink17URL=https://datasheet.octopart.com:443/C0603C102K5RAC-TU-Kemet-datasheet-7833651.pdf?src-supplier=Farnell, ComponentLink18Description=https://datasheet.octopart.com:443/C0603C102K5RAC-TU-Kemet-datasheet-7601896.pdf?src-supplier=Farnell, ComponentLink18URL=https://datasheet.octopart.com:443/C0603C102K5RAC-TU-Kemet-datasheet-7601896.pdf?src-supplier=Farnell, ComponentLink19Description=https://datasheet.octopart.com:443/C0603C102K5RAC-TU-Kemet-datasheet-5316294.pdf?src-supplier=Farnell, ComponentLink19URL=https://datasheet.octopart.com:443/C0603C102K5RAC-TU-Kemet-datasheet-5316294.pdf?src-supplier=Farnell, ComponentLink20Description=https://datasheet.octopart.com:443/C0603C102K5RAC-TU-Kemet-datasheet-5314837.pdf?src-supplier=Farnell, ComponentLink20URL=https://datasheet.octopart.com:443/C0603C102K5RAC-TU-Kemet-datasheet-5314837.pdf?src-supplier=Farnell, ComponentLink21Description=https://datasheet.octopart.com:443/C0603C102K5RAC-TU-Kemet-datasheet-8092359.pdf?src-supplier=Farnell, ComponentLink21URL=https://datasheet.octopart.com:443/C0603C102K5RAC-TU-Kemet-datasheet-8092359.pdf?src-supplier=Farnell, ComponentLink22Description=https://datasheet.octopart.com:443/C0603C102K5RAC-TU-Kemet-datasheet-5314449.pdf?src-supplier=Farnell, ComponentLink22URL=https://datasheet.octopart.com:443/C0603C102K5RAC-TU-Kemet-datasheet-5314449.pdf?src-supplier=Farnell, ComponentLink23Description=https://datasheet.octopart.com:443/C0603C102K5RAC-TU-Kemet-datasheet-5314969.pdf?src-supplier=Farnell, ComponentLink23URL=https://datasheet.octopart.com:443/C0603C102K5RAC-TU-Kemet-datasheet-5314969.pdf?src-supplier=Farnell, ComponentLink24Description=https://datasheet.octopart.com:443/C0603C102K5RAC-TU-Kemet-datasheet-5314627.pdf?src-supplier=Farnell, ComponentLink24URL=https://datasheet.octopart.com:443/C0603C102K5RAC-TU-Kemet-datasheet-5314627.pdf?src-supplier=Farnell, ComponentLink25Description=https://datasheet.octopart.com:443/C0603C102K5RAC-TU-Kemet-datasheet-5389132.pdf?src-supplier=Farnell, ComponentLink25URL=https://datasheet.octopart.com:443/C0603C102K5RAC-TU-Kemet-datasheet-5389132.pdf?src-supplier=Farnell, ComponentLink26Description=https://datasheet.octopart.com:443/C0603C102K5RAC-TU-Kemet-datasheet-5313836.pdf?src-supplier=Farnell, ComponentLink26URL=https://datasheet.octopart.com:443/C0603C102K5RAC-TU-Kemet-datasheet-5313836.pdf?src-supplier=Farnell, ComponentLink27Description=https://datasheet.octopart.com:443/C0603C102K5RAC-TU-Kemet-datasheet-8111010.pdf?src-supplier=Farnell, ComponentLink27URL=https://datasheet.octopart.com:443/C0603C102K5RAC-TU-Kemet-datasheet-8111010.pdf?src-supplier=Farnell, ComponentLink28Description=https://datasheet.octopart.com:443/C0603C102K5RAC-TU-Kemet-datasheet-7627733.pdf?src-supplier=Farnell, ComponentLink28URL=https://datasheet.octopart.com:443/C0603C102K5RAC-TU-Kemet-datasheet-7627733.pdf?src-supplier=Farnell, ComponentLink29Description=https://datasheet.octopart.com:443/C0603C102K5RACTU-Kemet-datasheet-500041.pdf?src-supplier=Farnell, ComponentLink29URL=https://datasheet.octopart.com:443/C0603C102K5RACTU-Kemet-datasheet-500041.pdf?src-supplier=Farnell, ComponentLink30Description=https://datasheet.octopart.com:443/C0603C102K5RAC-TU-Kemet-datasheet-5315946.pdf?src-supplier=Farnell, ComponentLink30URL=https://datasheet.octopart.com:443/C0603C102K5RAC-TU-Kemet-datasheet-5315946.pdf?src-supplier=Farnell, ComponentLink31Description=https://datasheet.octopart.com:443/C0603C102K5RACTU-KEMET-datasheet-137357764.pdf?src-supplier=Upverter, ComponentLink31URL=https://datasheet.octopart.com:443/C0603C102K5RACTU-KEMET-datasheet-137357764.pdf?src-supplier=Upverter, ComponentLink32Description=https://datasheet.octopart.com:443/C0603C102K5RAC7867-KEMET-datasheet-188512054.pdf?src-supplier=ODG+(Origin+Data+Global), ComponentLink32URL=https://datasheet.octopart.com:443/C0603C102K5RAC7867-KEMET-datasheet-188512054.pdf?src-supplier=ODG+(Origin+Data+Global), ComponentLink33Description=https://datasheet.octopart.com:443/C0603C102K5RACTU-KEMET-datasheet-32036385.pdf?src-supplier=Electro+Sonic, ComponentLink33URL=https://datasheet.octopart.com:443/C0603C102K5RACTU-KEMET-datasheet-32036385.pdf?src-supplier=Electro+Sonic, ComponentLink34Description=https://datasheet.octopart.com:443/C0603C102K5RACTU-KEMET-datasheet-157246124.pdf?src-supplier=Electro+Sonic, ComponentLink34URL=https://datasheet.octopart.com:443/C0603C102K5RACTU-KEMET-datasheet-157246124.pdf?src-supplier=Electro+Sonic, ComponentLink35Description=https://datasheet.octopart.com:443/C0603C102K5RACTU-KEMET-datasheet-176142155.pdf?src-supplier=Newark, ComponentLink35URL=https://datasheet.octopart.com:443/C0603C102K5RACTU-KEMET-datasheet-176142155.pdf?src-supplier=Newark, ComponentLink36Description=https://datasheet.octopart.com:443/C0603C102K5RACTU-Kemet-datasheet-27203261.pdf?src-supplier=Newark, ComponentLink36URL=https://datasheet.octopart.com:443/C0603C102K5RACTU-Kemet-datasheet-27203261.pdf?src-supplier=Newark, ComponentLink37Description=https://datasheet.octopart.com:443/C0603C102K5RACTU-KEMET-datasheet-164512540.pdf?src-supplier=TME, ComponentLink37URL=https://datasheet.octopart.com:443/C0603C102K5RACTU-KEMET-datasheet-164512540.pdf?src-supplier=TME, ComponentLink38Description=https://datasheet.octopart.com:443/C0603C102K5RACTU-Kemet-datasheet-67830780.pdf?src-supplier=TME, ComponentLink38URL=https://datasheet.octopart.com:443/C0603C102K5RACTU-Kemet-datasheet-67830780.pdf?src-supplier=TME, ComponentLink39Description=https://datasheet.octopart.com:443/C0603C102K5RACTU-KEMET-datasheet-134791355.pdf?src-supplier=TME, ComponentLink39URL=https://datasheet.octopart.com:443/C0603C102K5RACTU-KEMET-datasheet-134791355.pdf?src-supplier=TME, ComponentLink40Description=https://datasheet.octopart.com:443/C0603C102K5RACTU-KEMET-datasheet-68331906.pdf?src-supplier=TME, ComponentLink40URL=https://datasheet.octopart.com:443/C0603C102K5RACTU-KEMET-datasheet-68331906.pdf?src-supplier=TME, ComponentLink41Description=https://datasheet.octopart.com:443/C0603C102K5RACTU-KEMET-datasheet-110724412.pdf?src-supplier=RS+(Formerly+Allied+Electronics), ComponentLink41URL=https://datasheet.octopart.com:443/C0603C102K5RACTU-KEMET-datasheet-110724412.pdf?src-supplier=RS+(Formerly+Allied+Electronics), ComponentLink42Description=https://datasheet.octopart.com:443/C0603C102K5RACTU-Kemet-datasheet-464.pdf?src-supplier=RS+(Formerly+Allied+Electronics), ComponentLink42URL=https://datasheet.octopart.com:443/C0603C102K5RACTU-Kemet-datasheet-464.pdf?src-supplier=RS+(Formerly+Allied+Electronics), ComponentLink43Description=https://datasheet.octopart.com/C0603C102K5RACTU-KEMET-datasheet-84169754.pdf, ComponentLink43URL=https://datasheet.octopart.com/C0603C102K5RACTU-KEMET-datasheet-84169754.pdf, ComponentLink44Description=https://datasheet.octopart.com:443/C0603C102K5RACTU-Kemet-datasheet-22084244.pdf?src-supplier=element14+APAC, ComponentLink44URL=https://datasheet.octopart.com:443/C0603C102K5RACTU-Kemet-datasheet-22084244.pdf?src-supplier=element14+APAC, ComponentLink45Description=https://datasheet.octopart.com:443/C0603C102K5RAC7867-KEMET-datasheet-164857143.pdf?src-supplier=Burklin+Elektronik, ComponentLink45URL=https://datasheet.octopart.com:443/C0603C102K5RAC7867-KEMET-datasheet-164857143.pdf?src-supplier=Burklin+Elektronik, Contact Plating=Tin, Depth=800µm, Dissipation Factor=2.5%, Height=800µm, Lead Free="Lead Free", Lead Pitch=700µm, Length=1.6mm, Lifecycle Status=Production, Manufacturer Part Number=C0603C102K5RACTU, Material=Ceramic, Mounting Technology="Surface Mount", Number of Terminals=2, Packaging="Cut Tape", Pins=2, Pricing="1=0.08, 10=0.014, 50=0.012, 100=0.0096 (USD)", Radiation Hardening=No, REACH SVHC=Yes, RoHS=Compliant, Schedule B="8532240020, 8532240020|8532240020, 8532240020|8532240020|8532240020, 8532240020|8532240020|8532240020|8532240020", Stock=3544038, Supplier=DigiKey, Termination=SMD/SMT, Thickness=863.6µm, Voltage Rating=50V, Voltage Rating (AC)=50V, Voltage Rating (DC)=50V, Width=800µm
C3 C6 C7 C8 C17 C31 C34 C36 C37 C43 C45 C49: library part C0603C104K5RACTU, "50V 100nF X7R ±10% 0603 Multilayer Ceramic Capacitors MLCC - SMD/SMT ROHS", Case Code (Imperial)=0603, Dielectric=X7R, Dielectric Material=Ceramic, Manufacturer=KEMET, Max Operating Temperature=125°C, Min Operating Temperature=-55°C, Supplier Part Number=399-C0603C104K5RACTUCT-ND, Temperature Coefficient=30ppm/°C, Tolerance=10%, Voltage=50V, Case/Package=0603, Category="Ceramic Capacitors", China RoHS=Compliant, ComponentLink1Description=https://datasheet.octopart.com:443/C0603C104K5RACTU-KEMET-datasheet-178445679.pdf?src-supplier=IHS, ComponentLink1URL=https://datasheet.octopart.com:443/C0603C104K5RACTU-KEMET-datasheet-178445679.pdf?src-supplier=IHS, ComponentLink2Description=https://datasheet.octopart.com:443/C0603C104K5RAC7867-KEMET-datasheet-184792804.pdf?src-supplier=IHS, ComponentLink2URL=https://datasheet.octopart.com:443/C0603C104K5RAC7867-KEMET-datasheet-184792804.pdf?src-supplier=IHS, ComponentLink3Description=https://datasheet.octopart.com:443/C0603C104K5RACTU-KEMET-datasheet-137357759.pdf?src-supplier=Farnell, ComponentLink3URL=https://datasheet.octopart.com:443/C0603C104K5RACTU-KEMET-datasheet-137357759.pdf?src-supplier=Farnell, ComponentLink4Description=https://datasheet.octopart.com:443/C0603C104K5RACTU-KEMET-datasheet-149521864.pdf?src-supplier=Farnell, ComponentLink4URL=https://datasheet.octopart.com:443/C0603C104K5RACTU-KEMET-datasheet-149521864.pdf?src-supplier=Farnell, ComponentLink5Description=https://datasheet.octopart.com:443/C0603C104K5RACTU-KEMET-datasheet-101575654.pdf?src-supplier=Farnell, ComponentLink5URL=https://datasheet.octopart.com:443/C0603C104K5RACTU-KEMET-datasheet-101575654.pdf?src-supplier=Farnell, ComponentLink6Description=https://datasheet.octopart.com:443/C0603C104K5RACTU-KEMET-datasheet-176142159.pdf?src-supplier=Farnell, ComponentLink6URL=https://datasheet.octopart.com:443/C0603C104K5RACTU-KEMET-datasheet-176142159.pdf?src-supplier=Farnell, ComponentLink7Description=https://datasheet.octopart.com:443/C0603C104K5RAC-TU-Kemet-datasheet-7833651.pdf?src-supplier=Farnell, ComponentLink7URL=https://datasheet.octopart.com:443/C0603C104K5RAC-TU-Kemet-datasheet-7833651.pdf?src-supplier=Farnell, ComponentLink8Description=https://datasheet.octopart.com:443/C0603C104K5RAC-TU-Kemet-datasheet-7601896.pdf?src-supplier=Farnell, ComponentLink8URL=https://datasheet.octopart.com:443/C0603C104K5RAC-TU-Kemet-datasheet-7601896.pdf?src-supplier=Farnell, ComponentLink9Description=https://datasheet.octopart.com:443/C0603C104K5RAC-TU-Kemet-datasheet-5316294.pdf?src-supplier=Farnell, ComponentLink9URL=https://datasheet.octopart.com:443/C0603C104K5RAC-TU-Kemet-datasheet-5316294.pdf?src-supplier=Farnell, ComponentLink10Description=https://datasheet.octopart.com:443/C0603C104K5RAC-TU-Kemet-datasheet-5314837.pdf?src-supplier=Farnell, ComponentLink10URL=https://datasheet.octopart.com:443/C0603C104K5RAC-TU-Kemet-datasheet-5314837.pdf?src-supplier=Farnell, ComponentLink11Description=https://datasheet.octopart.com:443/C0603C104K5RAC-TU-Kemet-datasheet-8092359.pdf?src-supplier=Farnell, ComponentLink11URL=https://datasheet.octopart.com:443/C0603C104K5RAC-TU-Kemet-datasheet-8092359.pdf?src-supplier=Farnell, ComponentLink12Description=https://datasheet.octopart.com:443/C0603C104K5RAC-TU-Kemet-datasheet-5314449.pdf?src-supplier=Farnell, ComponentLink12URL=https://datasheet.octopart.com:443/C0603C104K5RAC-TU-Kemet-datasheet-5314449.pdf?src-supplier=Farnell, ComponentLink13Description=https://datasheet.octopart.com:443/C0603C104K5RAC-TU-Kemet-datasheet-5314969.pdf?src-supplier=Farnell, ComponentLink13URL=https://datasheet.octopart.com:443/C0603C104K5RAC-TU-Kemet-datasheet-5314969.pdf?src-supplier=Farnell, ComponentLink14Description=https://datasheet.octopart.com:443/C0603C104K5RAC-TU-Kemet-datasheet-5314627.pdf?src-supplier=Farnell, ComponentLink14URL=https://datasheet.octopart.com:443/C0603C104K5RAC-TU-Kemet-datasheet-5314627.pdf?src-supplier=Farnell, ComponentLink15Description=https://datasheet.octopart.com:443/C0603C104K5RAC-TU-Kemet-datasheet-5389132.pdf?src-supplier=Farnell, ComponentLink15URL=https://datasheet.octopart.com:443/C0603C104K5RAC-TU-Kemet-datasheet-5389132.pdf?src-supplier=Farnell, ComponentLink16Description=https://datasheet.octopart.com:443/C0603C104K5RAC-TU-Kemet-datasheet-5313836.pdf?src-supplier=Farnell, ComponentLink16URL=https://datasheet.octopart.com:443/C0603C104K5RAC-TU-Kemet-datasheet-5313836.pdf?src-supplier=Farnell, ComponentLink17Description=https://datasheet.octopart.com:443/C0603C104K5RAC-TU-Kemet-datasheet-8111010.pdf?src-supplier=Farnell, ComponentLink17URL=https://datasheet.octopart.com:443/C0603C104K5RAC-TU-Kemet-datasheet-8111010.pdf?src-supplier=Farnell, ComponentLink18Description=https://datasheet.octopart.com:443/C0603C104K5RAC-TU-Kemet-datasheet-7627733.pdf?src-supplier=Farnell, ComponentLink18URL=https://datasheet.octopart.com:443/C0603C104K5RAC-TU-Kemet-datasheet-7627733.pdf?src-supplier=Farnell, ComponentLink19Description=https://datasheet.octopart.com:443/C0603C104K5RAC-TU-Kemet-datasheet-5315946.pdf?src-supplier=Farnell, ComponentLink19URL=https://datasheet.octopart.com:443/C0603C104K5RAC-TU-Kemet-datasheet-5315946.pdf?src-supplier=Farnell, ComponentLink20Description=https://datasheet.octopart.com:443/C0603C104K5RACTU-KEMET-datasheet-137357764.pdf?src-supplier=Upverter, ComponentLink20URL=https://datasheet.octopart.com:443/C0603C104K5RACTU-KEMET-datasheet-137357764.pdf?src-supplier=Upverter, ComponentLink21Description=https://datasheet.octopart.com:443/C0603C104K5RAC-TU-Kemet-datasheet-5313890.pdf?src-supplier=Newark, ComponentLink21URL=https://datasheet.octopart.com:443/C0603C104K5RAC-TU-Kemet-datasheet-5313890.pdf?src-supplier=Newark, ComponentLink22Description=https://datasheet.octopart.com:443/C0603C104K5RACTU-Kemet-datasheet-12608295.pdf?src-supplier=Newark, ComponentLink22URL=https://datasheet.octopart.com:443/C0603C104K5RACTU-Kemet-datasheet-12608295.pdf?src-supplier=Newark, ComponentLink23Description=https://datasheet.octopart.com:443/C0603C104K5RACTU-Kemet-datasheet-11992184.pdf?src-supplier=Newark, ComponentLink23URL=https://datasheet.octopart.com:443/C0603C104K5RACTU-Kemet-datasheet-11992184.pdf?src-supplier=Newark, ComponentLink24Description=https://datasheet.octopart.com:443/C0603C104K5RACTU-Kemet-datasheet-10942409.pdf?src-supplier=Newark, ComponentLink24URL=https://datasheet.octopart.com:443/C0603C104K5RACTU-Kemet-datasheet-10942409.pdf?src-supplier=Newark, ComponentLink25Description=https://datasheet.octopart.com:443/C0603C104K5RACTU-Kemet-datasheet-10404442.pdf?src-supplier=Newark, ComponentLink25URL=https://datasheet.octopart.com:443/C0603C104K5RACTU-Kemet-datasheet-10404442.pdf?src-supplier=Newark, ComponentLink26Description=https://datasheet.octopart.com:443/C0603C104K5RAC-TU-Kemet-datasheet-5390537.pdf?src-supplier=Newark, ComponentLink26URL=https://datasheet.octopart.com:443/C0603C104K5RAC-TU-Kemet-datasheet-5390537.pdf?src-supplier=Newark, ComponentLink27Description=https://datasheet.octopart.com:443/C0603C104K5RAC-TU-Kemet-datasheet-7541751.pdf?src-supplier=Newark, ComponentLink27URL=https://datasheet.octopart.com:443/C0603C104K5RAC-TU-Kemet-datasheet-7541751.pdf?src-supplier=Newark, ComponentLink28Description=https://datasheet.octopart.com:443/C0603C104K5RACTU-KEMET-datasheet-171829795.pdf?src-supplier=Newark, ComponentLink28URL=https://datasheet.octopart.com:443/C0603C104K5RACTU-KEMET-datasheet-171829795.pdf?src-supplier=Newark, ComponentLink29Description=https://datasheet.octopart.com:443/C0603C104K5RACTU-Kemet-datasheet-8764837.pdf?src-supplier=Newark, ComponentLink29URL=https://datasheet.octopart.com:443/C0603C104K5RACTU-Kemet-datasheet-8764837.pdf?src-supplier=Newark, ComponentLink30Description=https://datasheet.octopart.com:443/C0603C104K5RACTU-Kemet-datasheet-8480123.pdf?src-supplier=Newark, ComponentLink30URL=https://datasheet.octopart.com:443/C0603C104K5RACTU-Kemet-datasheet-8480123.pdf?src-supplier=Newark, ComponentLink31Description=https://datasheet.octopart.com:443/C0603C104K5RACTU-Kemet-datasheet-5393970.pdf?src-supplier=Newark, ComponentLink31URL=https://datasheet.octopart.com:443/C0603C104K5RACTU-Kemet-datasheet-5393970.pdf?src-supplier=Newark, ComponentLink32Description=https://datasheet.octopart.com:443/C0603C104K5RACTU-Kemet-datasheet-8502025.pdf?src-supplier=Newark, ComponentLink32URL=https://datasheet.octopart.com:443/C0603C104K5RACTU-Kemet-datasheet-8502025.pdf?src-supplier=Newark, ComponentLink33Description=https://datasheet.octopart.com:443/C0603C104K5RACTU-Kemet-datasheet-161801.pdf?src-supplier=Newark, ComponentLink33URL=https://datasheet.octopart.com:443/C0603C104K5RACTU-Kemet-datasheet-161801.pdf?src-supplier=Newark, ComponentLink34Description=https://datasheet.octopart.com:443/C0603C104K5RACTU-Kemet-datasheet-32036385.pdf?src-supplier=Electro+Sonic, ComponentLink34URL=https://datasheet.octopart.com:443/C0603C104K5RACTU-Kemet-datasheet-32036385.pdf?src-supplier=Electro+Sonic, ComponentLink35Description=https://datasheet.octopart.com:443/C0603C104K5RACTU-KEMET-datasheet-157246124.pdf?src-supplier=Electro+Sonic, ComponentLink35URL=https://datasheet.octopart.com:443/C0603C104K5RACTU-KEMET-datasheet-157246124.pdf?src-supplier=Electro+Sonic, ComponentLink36Description=https://datasheet.octopart.com:443/C0603C104K5RACTU-KEMET-datasheet-164512540.pdf?src-supplier=TME, ComponentLink36URL=https://datasheet.octopart.com:443/C0603C104K5RACTU-KEMET-datasheet-164512540.pdf?src-supplier=TME, ComponentLink37Description=https://datasheet.octopart.com:443/C0603C104K5RACTU-Kemet-datasheet-67830781.pdf?src-supplier=TME, ComponentLink37URL=https://datasheet.octopart.com:443/C0603C104K5RACTU-Kemet-datasheet-67830781.pdf?src-supplier=TME, ComponentLink38Description=https://datasheet.octopart.com:443/C0603C104K5RACTU-KEMET-datasheet-68331906.pdf?src-supplier=TME, ComponentLink38URL=https://datasheet.octopart.com:443/C0603C104K5RACTU-KEMET-datasheet-68331906.pdf?src-supplier=TME, ComponentLink39Description=https://datasheet.octopart.com:443/C0603C104K5RAC7867-Kemet-datasheet-62098571.pdf?src-supplier=TME, ComponentLink39URL=https://datasheet.octopart.com:443/C0603C104K5RAC7867-Kemet-datasheet-62098571.pdf?src-supplier=TME, ComponentLink40Description=https://datasheet.octopart.com:443/C0603C104K5RAC7867-Kemet-datasheet-17577222.pdf?src-supplier=TME, ComponentLink40URL=https://datasheet.octopart.com:443/C0603C104K5RAC7867-Kemet-datasheet-17577222.pdf?src-supplier=TME, ComponentLink41Description=https://datasheet.octopart.com:443/C0603C104K5RACTU-KEMET-datasheet-110724412.pdf?src-supplier=RS+(Formerly+Allied+Electronics), ComponentLink41URL=https://datasheet.octopart.com:443/C0603C104K5RACTU-KEMET-datasheet-110724412.pdf?src-supplier=RS+(Formerly+Allied+Electronics), ComponentLink42Description=https://datasheet.octopart.com:443/C0603C104K5RACTU-Kemet-datasheet-464.pdf?src-supplier=RS+(Formerly+Allied+Electronics), ComponentLink42URL=https://datasheet.octopart.com:443/C0603C104K5RACTU-Kemet-datasheet-464.pdf?src-supplier=RS+(Formerly+Allied+Electronics), ComponentLink43Description=https://datasheet.octopart.com/C0603C104K5RACTU-KEMET-datasheet-84169754.pdf, ComponentLink43URL=https://datasheet.octopart.com/C0603C104K5RACTU-KEMET-datasheet-84169754.pdf, ComponentLink44Description=https://datasheet.octopart.com:443/C0603C104K5RACTU-Kemet-datasheet-24570007.pdf?src-supplier=element14+APAC, ComponentLink44URL=https://datasheet.octopart.com:443/C0603C104K5RACTU-Kemet-datasheet-24570007.pdf?src-supplier=element14+APAC, ComponentLink45Description=https://datasheet.octopart.com:443/C0603C104K5RACTU-Kemet-datasheet-22084244.pdf?src-supplier=element14+APAC, ComponentLink45URL=https://datasheet.octopart.com:443/C0603C104K5RACTU-Kemet-datasheet-22084244.pdf?src-supplier=element14+APAC, ComponentLink46Description=https://datasheet.octopart.com:443/C0603C104K5RACTU-Kemet-datasheet-21389238.pdf?src-supplier=element14+APAC, ComponentLink46URL=https://datasheet.octopart.com:443/C0603C104K5RACTU-Kemet-datasheet-21389238.pdf?src-supplier=element14+APAC, ComponentLink47Description=https://datasheet.octopart.com:443/C0603C104K5RACTU-Kemet-datasheet-11723057.pdf?src-supplier=Arrow+Electronics, ComponentLink47URL=https://datasheet.octopart.com:443/C0603C104K5RACTU-Kemet-datasheet-11723057.pdf?src-supplier=Arrow+Electronics, ComponentLink48Description=https://datasheet.octopart.com:443/C0603C104K5RAC7867-KEMET-datasheet-164857143.pdf?src-supplier=Burklin+Elektronik, ComponentLink48URL=https://datasheet.octopart.com:443/C0603C104K5RAC7867-KEMET-datasheet-164857143.pdf?src-supplier=Burklin+Elektronik, ComponentLink49Description=https://datasheet.octopart.com:443/C0603C104K5RAC-TU-Kemet-datasheet-8187850.pdf?src-supplier=Jameco, ComponentLink49URL=https://datasheet.octopart.com:443/C0603C104K5RAC-TU-Kemet-datasheet-8187850.pdf?src-supplier=Jameco, ComponentLink50Description=https://datasheet.octopart.com:443/C0603C104K5RACTU-Kemet-datasheet-122295.pdf?src-supplier=DigiKey, ComponentLink50URL=https://datasheet.octopart.com:443/C0603C104K5RACTU-Kemet-datasheet-122295.pdf?src-supplier=DigiKey, Contact Plating=Tin, Country of Origin=Mexico, Depth=800µm, Dissipation Factor=2.5%, Export Control Classification Number (ECCN) Code=EAR99, Harmonized Tariff Schedule (HTS) Code=8532.24.00.20, Height=800µm, Introduction Date=2011-07-27, Lead Free="Lead Free", Lead Pitch=700µm, Length=1.6mm, Lifecycle Status=Production, Manufacturer Part Number=C0603C104K5RACTU, Material=Ceramic, Mounting Technology="Surface Mount", Number of Terminals=2, Packaging="Tape & Reel", Pins=2, Pricing="1=0.08, 10=0.011 (USD)", Radiation Hardening=No, REACH SVHC=Yes, RoHS=Compliant, Schedule B="8532240020, 8532240020|8532240020, 8532240020|8532240020|8532240020, 8532240020|8532240020|8532240020|8532240020", Stock=12623196, Supplier=DigiKey, Termination=SMD/SMT, Thickness=863.6µm, Voltage Rating=50V, Voltage Rating (DC)=50V, Width=800µm
C9 C11 C39 C40 C41 C42 C44 C46 C47 C50: library part JMK105BJ105KV-F, "High Value Multilayer Ceramic Capacitors (High dielectric type)", Case Code (Imperial)=0402, Case Code (Metric)=1005, Dielectric=X5R, Dielectric Material=Ceramic, Manufacturer="Taiyo Yuden", Max Operating Temperature=85°C, Min Operating Temperature=-55°C, Supplier Part Number=587-1231-1-ND, Tolerance=10%, Voltage Rating=6.3V, Case/Package=0402, Category="Ceramic Capacitors", ComponentLink1Description=https://datasheet.octopart.com:443/JMK105BJ105KV-F-Taiyo-Yuden-datasheet-182105236.pdf?src-supplier=IHS, ComponentLink1URL=https://datasheet.octopart.com:443/JMK105BJ105KV-F-Taiyo-Yuden-datasheet-182105236.pdf?src-supplier=IHS, ComponentLink2Description=https://datasheet.octopart.com:443/JMK105BJ105KV-F-Taiyo-Yuden-datasheet-100443360.pdf?src-supplier=Upverter, ComponentLink2URL=https://datasheet.octopart.com:443/JMK105BJ105KV-F-Taiyo-Yuden-datasheet-100443360.pdf?src-supplier=Upverter, ComponentLink3Description=https://datasheet.octopart.com:443/JMK105BJ105KV-F-Taiyo-Yuden-datasheet-8857305.pdf?src-supplier=Newark, ComponentLink3URL=https://datasheet.octopart.com:443/JMK105BJ105KV-F-Taiyo-Yuden-datasheet-8857305.pdf?src-supplier=Newark, ComponentLink4Description=https://datasheet.octopart.com:443/JMK105BJ105KV-F-Taiyo-Yuden-datasheet-182874064.pdf?src-supplier=Newark, ComponentLink4URL=https://datasheet.octopart.com:443/JMK105BJ105KV-F-Taiyo-Yuden-datasheet-182874064.pdf?src-supplier=Newark, ComponentLink5Description=https://datasheet.octopart.com:443/JMK105BJ105KV-F-Taiyo-Yuden-datasheet-65970389.pdf?src-supplier=Newark, ComponentLink5URL=https://datasheet.octopart.com:443/JMK105BJ105KV-F-Taiyo-Yuden-datasheet-65970389.pdf?src-supplier=Newark, ComponentLink6Description=https://datasheet.octopart.com:443/JMK105BJ105KV-F-Taiyo-Yuden-datasheet-13695304.pdf?src-supplier=Newark, ComponentLink6URL=https://datasheet.octopart.com:443/JMK105BJ105KV-F-Taiyo-Yuden-datasheet-13695304.pdf?src-supplier=Newark, ComponentLink7Description=https://datasheet.octopart.com:443/JMK105BJ105KV-F-Taiyo-Yuden-datasheet-154808611.pdf?src-supplier=Master+Electronics, ComponentLink7URL=https://datasheet.octopart.com:443/JMK105BJ105KV-F-Taiyo-Yuden-datasheet-154808611.pdf?src-supplier=Master+Electronics, ComponentLink8Description=https://datasheet.octopart.com:443/JMK105BJ105KV-F-Taiyo-Yuden-datasheet-140424376.pdf?src-supplier=Master+Electronics, ComponentLink8URL=https://datasheet.octopart.com:443/JMK105BJ105KV-F-Taiyo-Yuden-datasheet-140424376.pdf?src-supplier=Master+Electronics, ComponentLink9Description=https://datasheet.octopart.com:443/JMK105BJ105KV-F-Taiyo-Yuden-datasheet-138516745.pdf?src-supplier=Master+Electronics, ComponentLink9URL=https://datasheet.octopart.com:443/JMK105BJ105KV-F-Taiyo-Yuden-datasheet-138516745.pdf?src-supplier=Master+Electronics, ComponentLink10Description=https://datasheet.octopart.com:443/JMK105BJ105KV-F-Taiyo-Yuden-datasheet-10851928.pdf?src-supplier=Future+Electronics, ComponentLink10URL=https://datasheet.octopart.com:443/JMK105BJ105KV-F-Taiyo-Yuden-datasheet-10851928.pdf?src-supplier=Future+Electronics, ComponentLink11Description=https://datasheet.octopart.com:443/JMK105BJ105KV-F-Taiyo-Yuden-datasheet-99833418.pdf?src-supplier=Future+Electronics, ComponentLink11URL=https://datasheet.octopart.com:443/JMK105BJ105KV-F-Taiyo-Yuden-datasheet-99833418.pdf?src-supplier=Future+Electronics, ComponentLink12Description=https://datasheet.octopart.com:443/JMK105BJ105KV-F-Taiyo-Yuden-datasheet-120265.pdf?src-supplier=Farnell, ComponentLink12URL=https://datasheet.octopart.com:443/JMK105BJ105KV-F-Taiyo-Yuden-datasheet-120265.pdf?src-supplier=Farnell, ComponentLink13Description=https://datasheet.octopart.com:443/JMK105BJ105KV-F-Taiyo-Yuden-datasheet-10742123.pdf?src-supplier=Farnell, ComponentLink13URL=https://datasheet.octopart.com:443/JMK105BJ105KV-F-Taiyo-Yuden-datasheet-10742123.pdf?src-supplier=Farnell, ComponentLink14Description=https://datasheet.octopart.com:443/JMK105BJ105KV-F-Taiyo-Yuden-datasheet-10545600.pdf?src-supplier=Farnell, ComponentLink14URL=https://datasheet.octopart.com:443/JMK105BJ105KV-F-Taiyo-Yuden-datasheet-10545600.pdf?src-supplier=Farnell, ComponentLink15Description=https://datasheet.octopart.com:443/JMK105BJ105KV-F-Taiyo-Yuden-datasheet-10622963.pdf?src-supplier=Farnell, ComponentLink15URL=https://datasheet.octopart.com:443/JMK105BJ105KV-F-Taiyo-Yuden-datasheet-10622963.pdf?src-supplier=Farnell, ComponentLink16Description=https://datasheet.octopart.com:443/JMK105BJ105KV-F-Taiyo-Yuden-datasheet-10618026.pdf?src-supplier=Farnell, ComponentLink16URL=https://datasheet.octopart.com:443/JMK105BJ105KV-F-Taiyo-Yuden-datasheet-10618026.pdf?src-supplier=Farnell, ComponentLink17Description=https://datasheet.octopart.com:443/JMK105BJ105KV-F-Taiyo-Yuden-datasheet-10549048.pdf?src-supplier=Farnell, ComponentLink17URL=https://datasheet.octopart.com:443/JMK105BJ105KV-F-Taiyo-Yuden-datasheet-10549048.pdf?src-supplier=Farnell, ComponentLink18Description=https://datasheet.octopart.com:443/JMK105BJ105KV-F-Taiyo-Yuden-datasheet-10671320.pdf?src-supplier=Farnell, ComponentLink18URL=https://datasheet.octopart.com:443/JMK105BJ105KV-F-Taiyo-Yuden-datasheet-10671320.pdf?src-supplier=Farnell, ComponentLink19Description=https://datasheet.octopart.com:443/JMK105BJ105KV-F-Taiyo-Yuden-datasheet-10620942.pdf?src-supplier=Farnell, ComponentLink19URL=https://datasheet.octopart.com:443/JMK105BJ105KV-F-Taiyo-Yuden-datasheet-10620942.pdf?src-supplier=Farnell, ComponentLink20Description=https://datasheet.octopart.com:443/JMK105BJ105KV-F-Taiyo-Yuden-datasheet-10408854.pdf?src-supplier=Farnell, ComponentLink20URL=https://datasheet.octopart.com:443/JMK105BJ105KV-F-Taiyo-Yuden-datasheet-10408854.pdf?src-supplier=Farnell, ComponentLink21Description=https://datasheet.octopart.com:443/JMK105BJ105KV-F-Taiyo-Yuden-datasheet-10283011.pdf?src-supplier=Farnell, ComponentLink21URL=https://datasheet.octopart.com:443/JMK105BJ105KV-F-Taiyo-Yuden-datasheet-10283011.pdf?src-supplier=Farnell, ComponentLink22Description=https://datasheet.octopart.com:443/JMK105BJ105KV-F-Taiyo-Yuden-datasheet-10031713.pdf?src-supplier=Farnell, ComponentLink22URL=https://datasheet.octopart.com:443/JMK105BJ105KV-F-Taiyo-Yuden-datasheet-10031713.pdf?src-supplier=Farnell, ComponentLink23Description=https://datasheet.octopart.com:443/JMK105BJ105KV-F-Taiyo-Yuden-datasheet-10854574.pdf?src-supplier=Farnell, ComponentLink23URL=https://datasheet.octopart.com:443/JMK105BJ105KV-F-Taiyo-Yuden-datasheet-10854574.pdf?src-supplier=Farnell, ComponentLink24Description=https://datasheet.octopart.com:443/JMK105BJ105KV-F-Taiyo-Yuden-datasheet-8820216.pdf?src-supplier=Farnell, ComponentLink24URL=https://datasheet.octopart.com:443/JMK105BJ105KV-F-Taiyo-Yuden-datasheet-8820216.pdf?src-supplier=Farnell, ComponentLink25Description=https://datasheet.octopart.com:443/JMK105BJ105KV-F-Taiyo-Yuden-datasheet-119523.pdf?src-supplier=Farnell, ComponentLink25URL=https://datasheet.octopart.com:443/JMK105BJ105KV-F-Taiyo-Yuden-datasheet-119523.pdf?src-supplier=Farnell, ComponentLink26Description=https://datasheet.octopart.com:443/JMK105BJ105KV-F-Taiyo-Yuden-datasheet-5326109.pdf?src-supplier=Farnell, ComponentLink26URL=https://datasheet.octopart.com:443/JMK105BJ105KV-F-Taiyo-Yuden-datasheet-5326109.pdf?src-supplier=Farnell, ComponentLink27Description=https://datasheet.octopart.com:443/JMK105BJ105KV-F-Taiyo-Yuden-datasheet-118905.pdf?src-supplier=Farnell, ComponentLink27URL=https://datasheet.octopart.com:443/JMK105BJ105KV-F-Taiyo-Yuden-datasheet-118905.pdf?src-supplier=Farnell, ComponentLink28Description=https://datasheet.octopart.com:443/JMK105BJ105KV-F-Taiyo-Yuden-datasheet-1645.pdf?src-supplier=Farnell, ComponentLink28URL=https://datasheet.octopart.com:443/JMK105BJ105KV-F-Taiyo-Yuden-datasheet-1645.pdf?src-supplier=Farnell, ComponentLink29Description=https://datasheet.octopart.com:443/JMK105BJ105KV-F-Taiyo-Yuden-datasheet-138738940.pdf?src-supplier=Taiyo+Yuden+SCT, ComponentLink29URL=https://datasheet.octopart.com:443/JMK105BJ105KV-F-Taiyo-Yuden-datasheet-138738940.pdf?src-supplier=Taiyo+Yuden+SCT, ComponentLink30Description=https://datasheet.octopart.com:443/JMK105BJ105KV-F-Taiyo-Yuden-datasheet-41181654.pdf?src-supplier=Electro+Sonic, ComponentLink30URL=https://datasheet.octopart.com:443/JMK105BJ105KV-F-Taiyo-Yuden-datasheet-41181654.pdf?src-supplier=Electro+Sonic, ComponentLink31Description=https://datasheet.octopart.com:443/JMK105BJ105KV-F-Taiyo-Yuden-datasheet-13693548.pdf?src-supplier=Electro+Sonic, ComponentLink31URL=https://datasheet.octopart.com:443/JMK105BJ105KV-F-Taiyo-Yuden-datasheet-13693548.pdf?src-supplier=Electro+Sonic, ComponentLink32Description=https://datasheet.octopart.com/JMK105BJ105KV-F-Taiyo-Yuden-datasheet-17273223.pdf, ComponentLink32URL=https://datasheet.octopart.com/JMK105BJ105KV-F-Taiyo-Yuden-datasheet-17273223.pdf, ComponentLink33Description=https://datasheet.octopart.com:443/JMK105BJ105KV-F-Taiyo-Yuden-datasheet-8434558.pdf?src-supplier=element14, ComponentLink33URL=https://datasheet.octopart.com:443/JMK105BJ105KV-F-Taiyo-Yuden-datasheet-8434558.pdf?src-supplier=element14, Composition=Ceramic, Depth=500µm, Halogen Free="Halogen Free", Height=500µm, Lead Free="Lead Free", Length=1mm, Lifecycle Status=NRND, Manufacturer Part Number=JMK105BJ105KV-F, Max Length=1.05mm, Max Thickness=550µm, Max Width=550µm, Min Length=950µm, Min Thickness=450µm, Min Width=450µm, Mounting Technology="Surface Mount", Number of Terminals=2, Packaging="Cut Tape", Pins=2, Pricing="1=0.08, 10=0.005 (USD)", Radiation Hardening=No, REACH SVHC=Yes, RoHS=Compliant, Stock=20863025, Supplier=DigiKey, Termination=SMD/SMT, Thickness=558.8µm, Voltage Rating (DC)=6.3V, Width=500µm